# Altium PCB BikeLogger.PcbDoc (part 1 of 2)
Units mm, origin at the board's own origin, x right, y up, seen from the top; angles counter-clockwise.
Board outline 85 x 49 mm, 4 copper layers (Components_TopLayer, Ground Plane, Power Plane, Traces_BottomLayer), stack 1.567 mm thick; 105 components, 67 nets, 358 pads, 135 vias.
Unrouted connection lines stored in the file: 1.
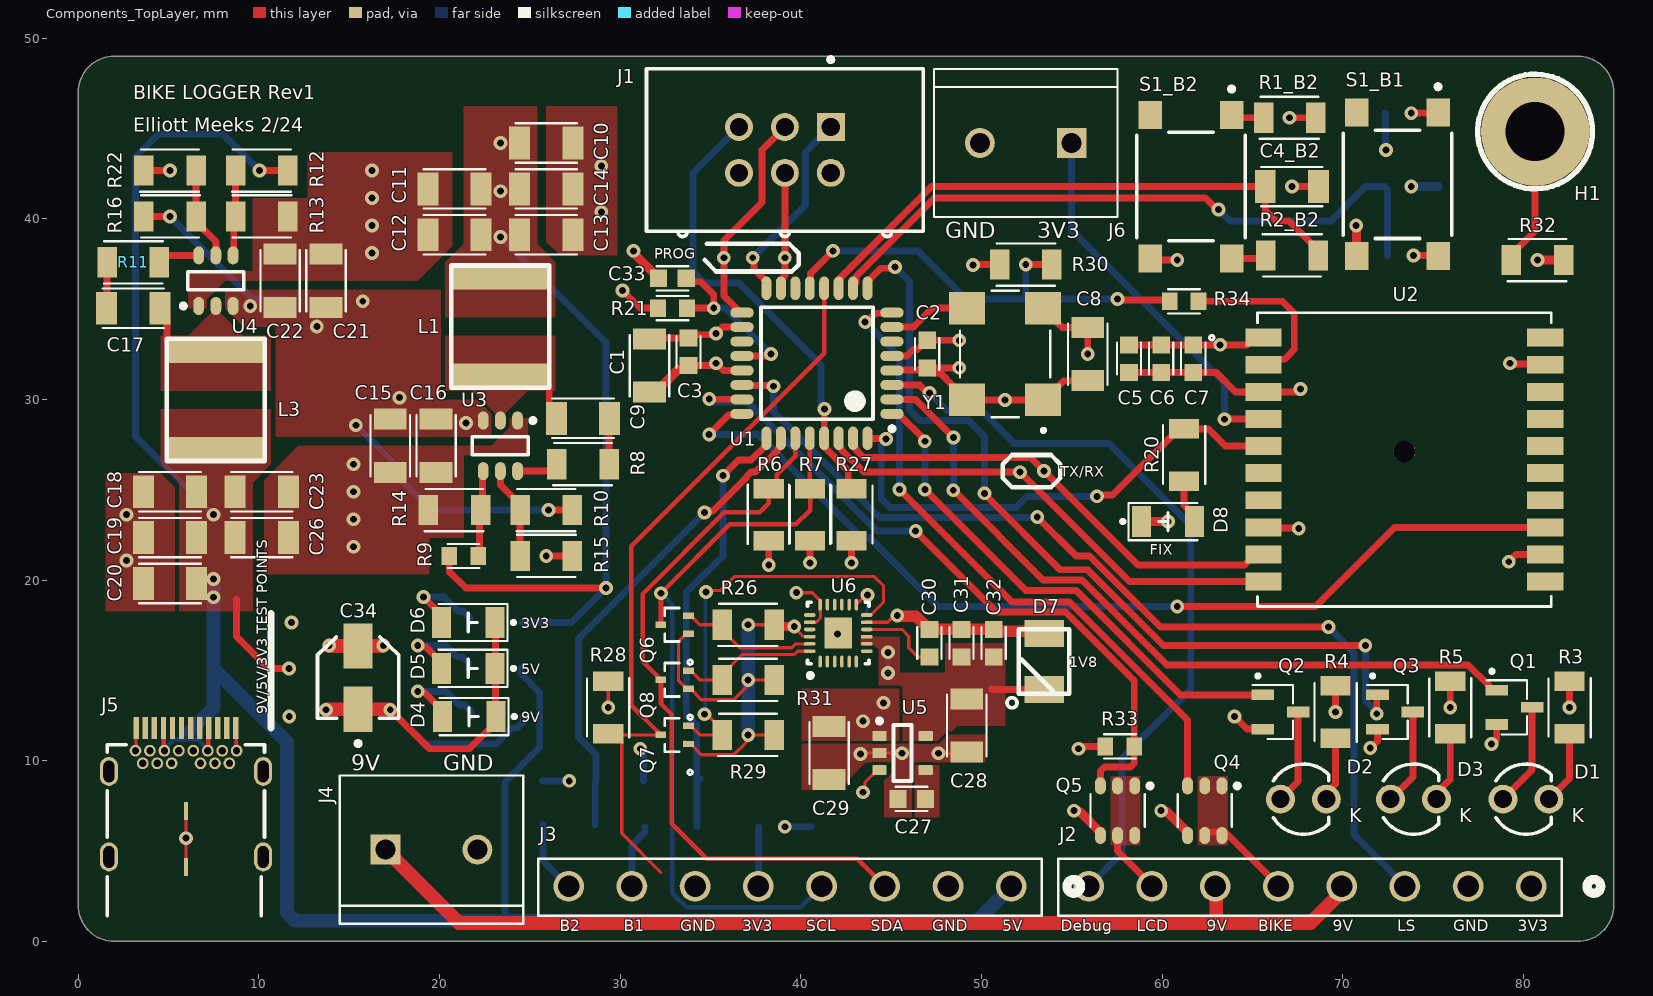
[diagram p0: Components_TopLayer view]
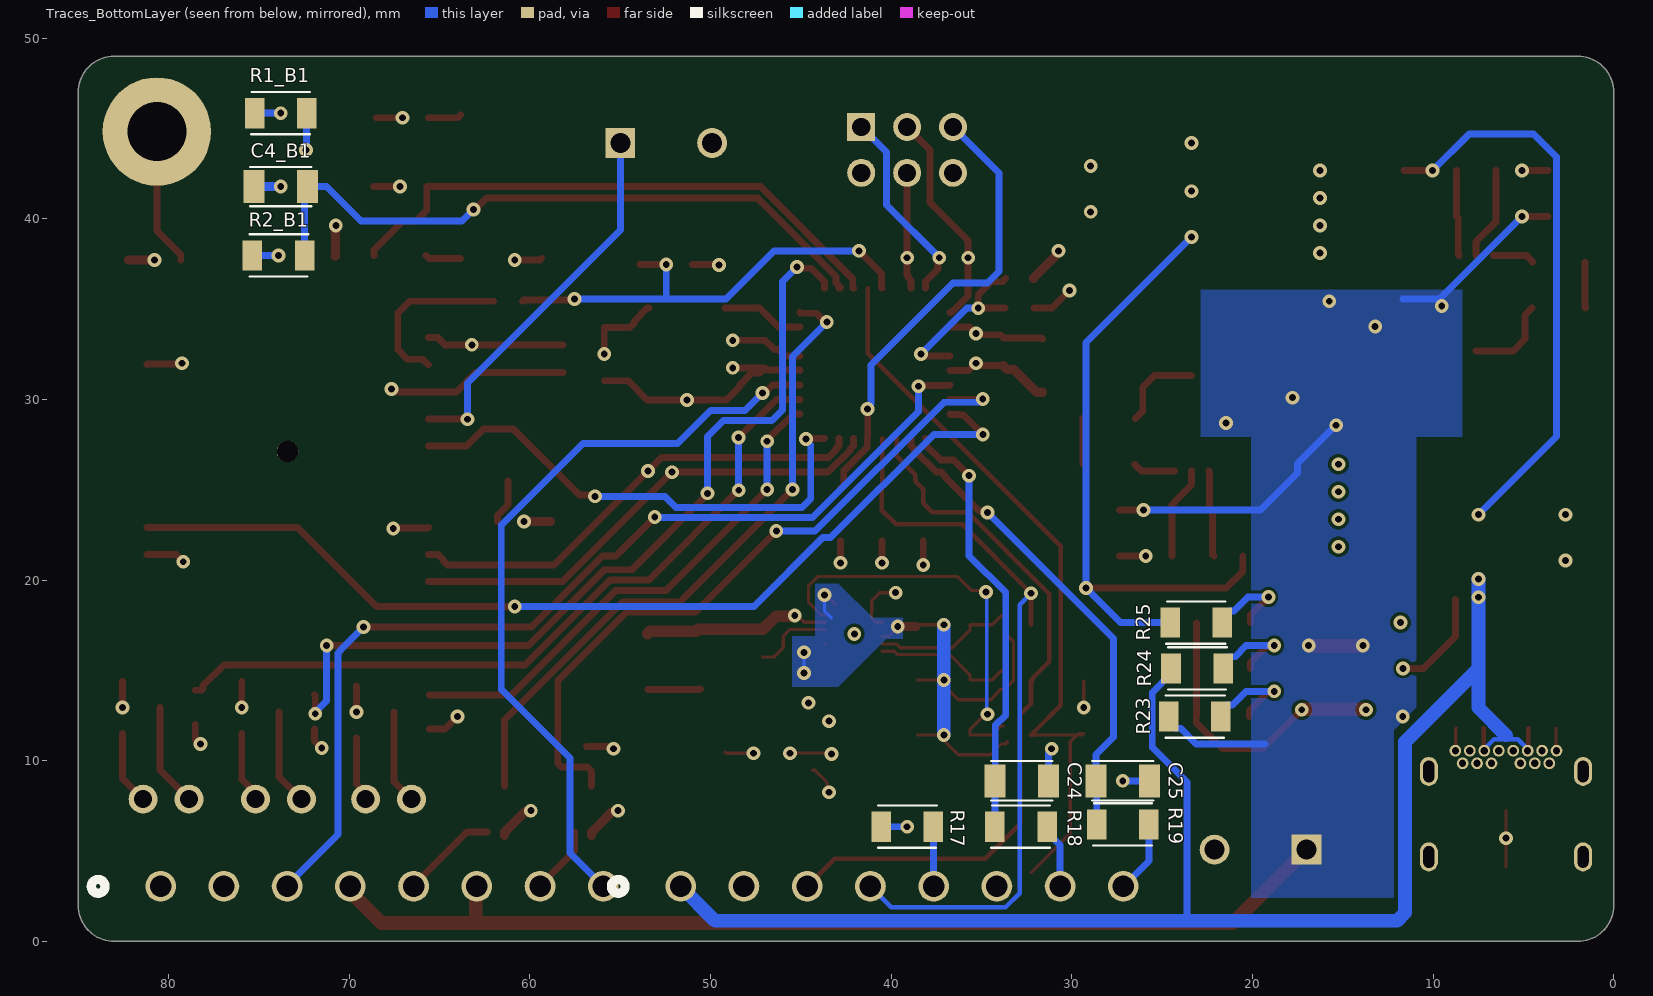
[diagram p1: Traces_BottomLayer view, seen from below]
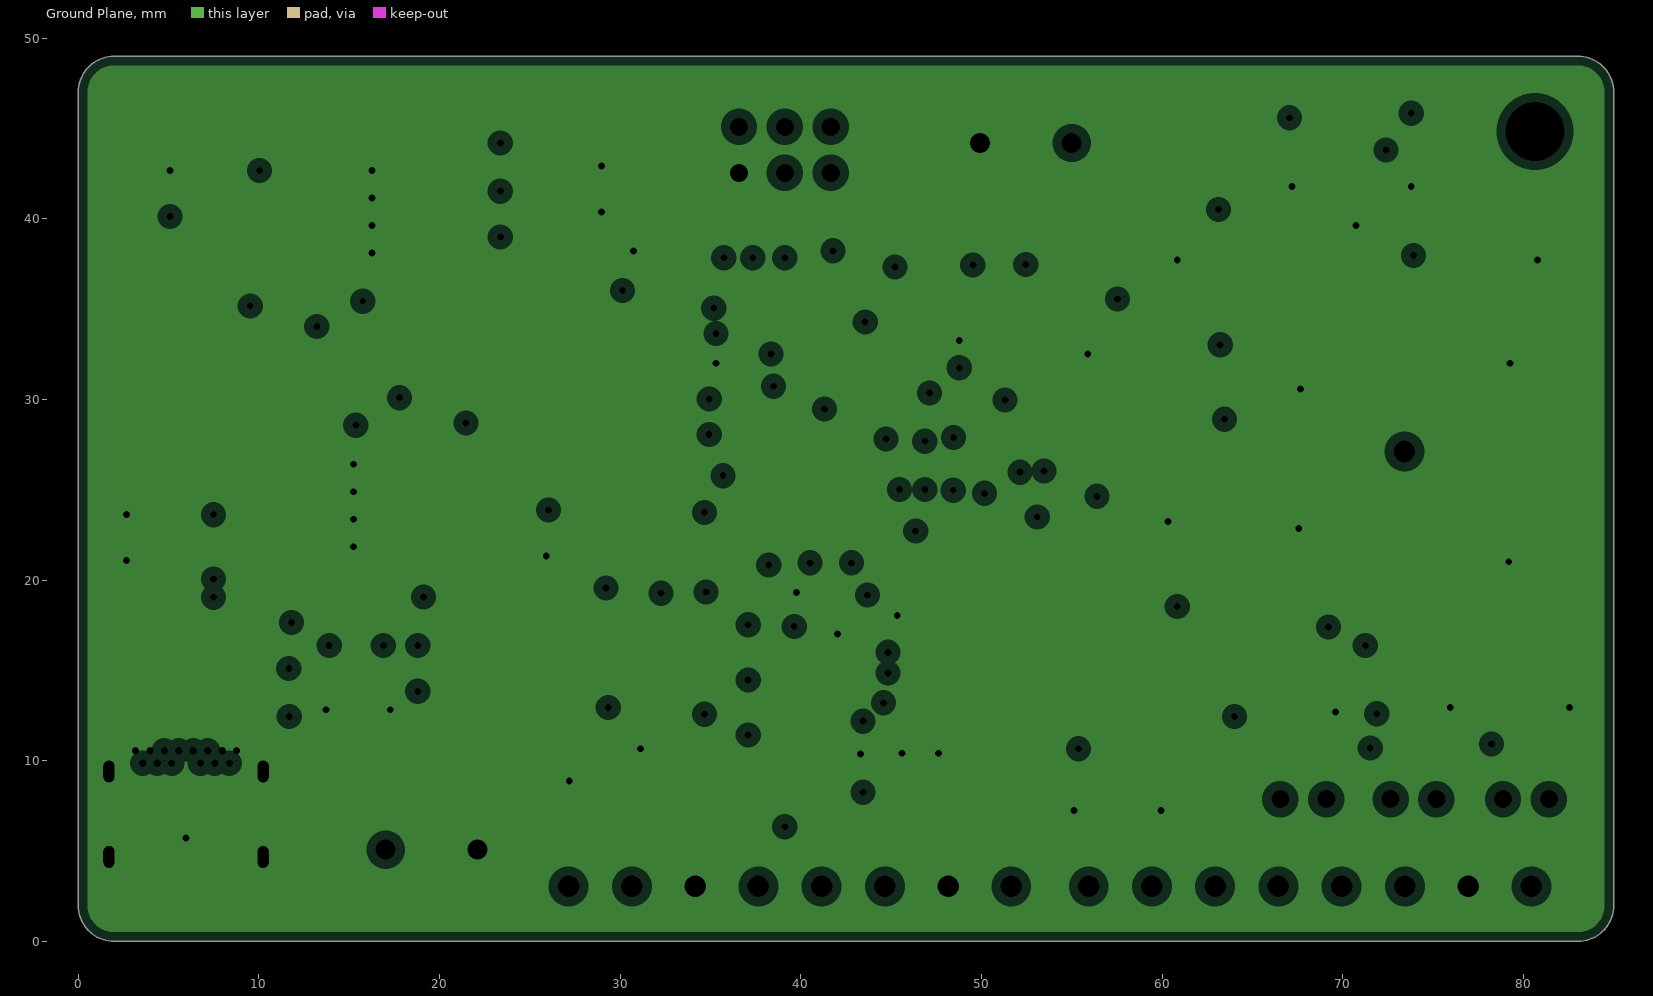
[diagram p2: Ground Plane, clearances drawn from the general rule]
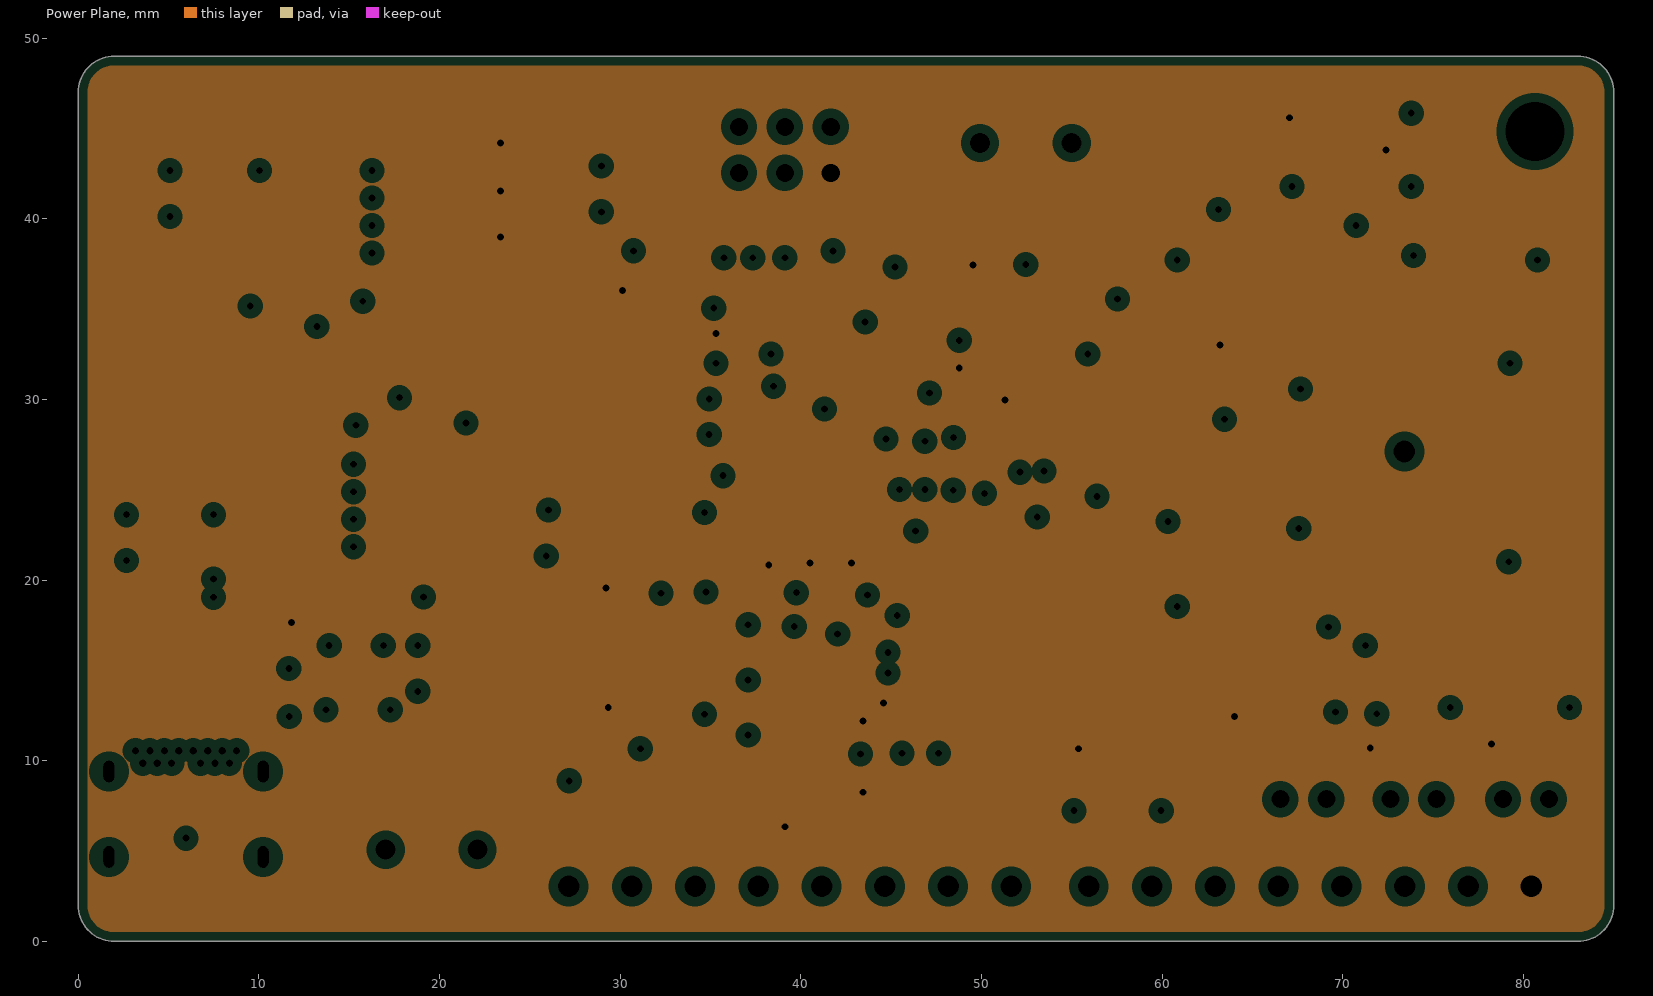
[diagram p3: Power Plane, clearances drawn from the general rule]
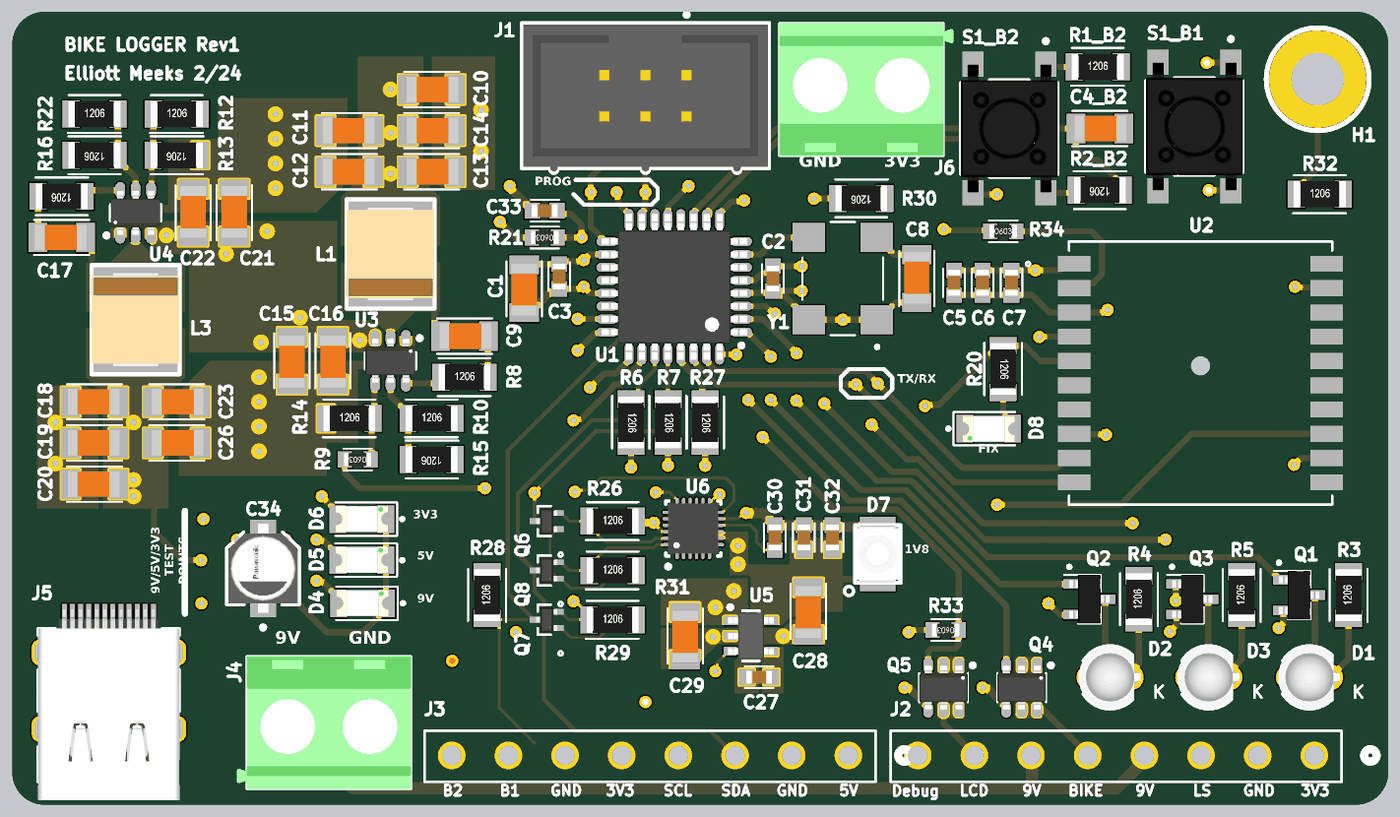
[diagram p5: 3D render of the assembled board from above, using the file's embedded part models]
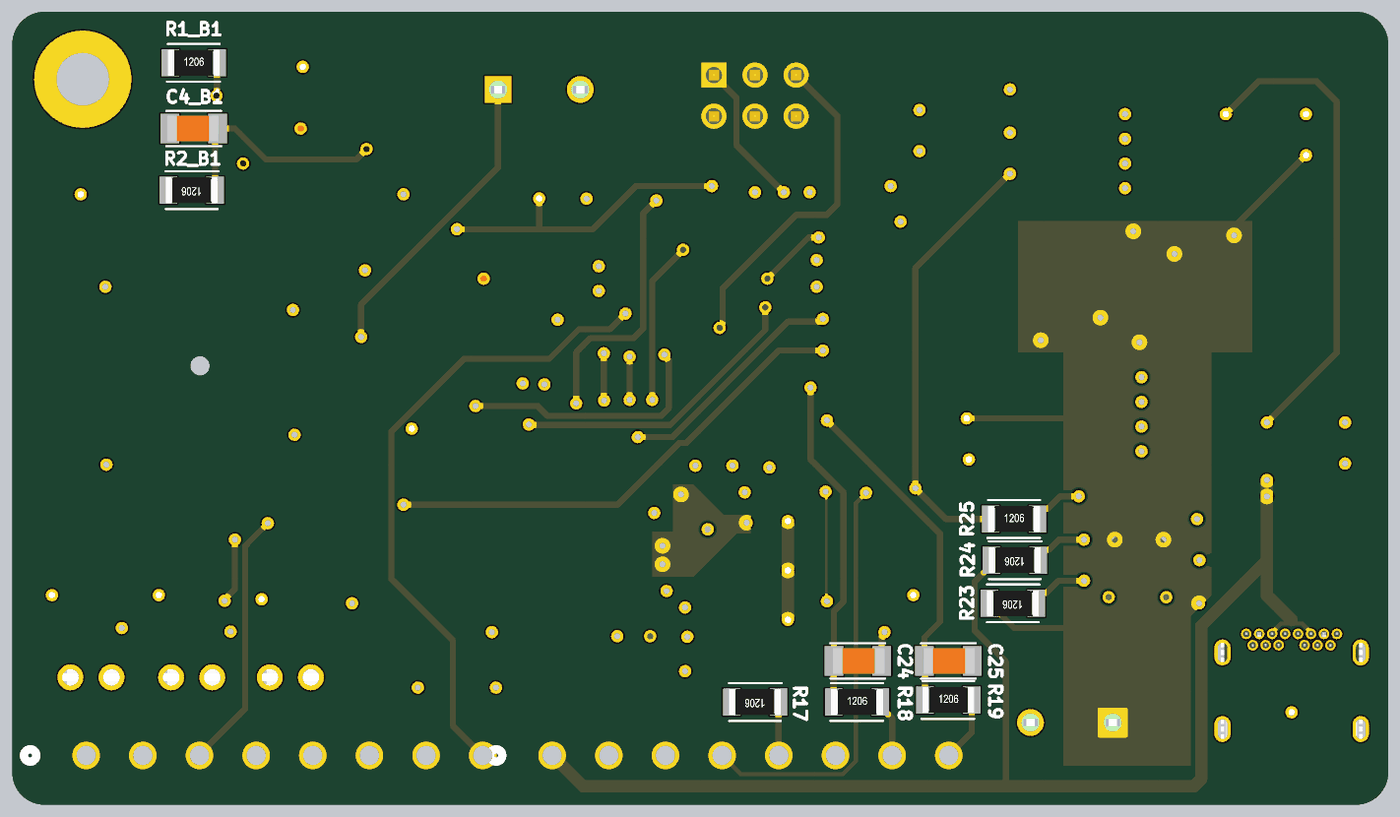
[diagram p6: 3D render of the assembled board from below, using the file's embedded part models]

## Layer stack, top to bottom
Top Solder: solder mask 0.0102, Solder Resist, Dk 3.5
Components_TopLayer: signal copper 0.035
Dielectric 3: prepreg 0.2184, PP-023, Dk 4.18
Ground Plane: plane copper 0.035, net GND
Dielectric 1: core 0.9906, Core-042, Dk 3.93
Power Plane: plane copper 0.035, net +3V3
Dielectric 2: prepreg 0.2184, PP-023, Dk 4.18
Traces_BottomLayer: signal copper 0.035
Bottom Solder: solder mask 0.0102, Solder Resist, Dk 3.5

## Board outline
0,2 0,47 cw(c2,47) 2,49 83,49 cw(c83,47) 85,47 85,2 cw(c83,2) 83,0 2,0 cw(c2,2)

## Design rules (kind name [scope] priority, off if disabled: settings)
BoardOutlineClearance [Not (OnLayer('Top Overlay') Or OnLayer('Bottom Overlay'))] p1: gap=0.508 ignorepadtopadclearanceinfootprint=FALSE except(0: Arc-SplitContinuation Track-SplitContinuation SMDPad-SplitContinuation THPad-SplitContinuation Via-SplitContinuation Fill-SplitContinuation Poly-SplitContinuation Region-SplitContinuation Text-OutlineEdge Text-CavityEdge Text-CutoutEdge Text-SplitBarrior Text-SplitContinuation)
Clearance CPWClearance [InNetClass('ImpedanceControlledCPW') vs InPolygon] p1: gap=0.254 ignorepadtopadclearanceinfootprint=FALSE
Clearance [All] p2: gap=0.178 ignorepadtopadclearanceinfootprint=FALSE except(0.254: Arc-Hole Track-Hole SMDPad-Hole THPad-Hole Via-Hole Fill-Hole Poly-Hole Region-Hole Text-Hole)
DiffPairsRouting [All] p1: maxlimit=0.254 minlimit=0.254 mostfreqgap=0.254 toplayer_minwidth=0.381 toplayer_maxwidth=25.4 toplayer_prefwidth=0.381 bottomlayer_minwidth=0.381 bottomlayer_maxwidth=25.4 bottomlayer_prefwidth=0.381 maxuncoupledlength=12.7
Height [All] p1: minheight=0 maxheight=35.56 prefheight=12.7
HoleSize [All] p1: absolutevalues=TRUE maxlimit=6.2 minlimit=0.3 maxpercent=80.000 minpercent=20.000
MinimumAnnularRing [All] p1: minimumring=0.152
MinimumSolderMaskSliver [All] p1 off: minsoldermaskwidth=0.229
PlaneClearance [All] p1: clearance=0.508
PlaneConnect [All] p1: planeconnectstyle=Direct reliefexpansion=0.508 reliefentries=4 reliefconductorwidth=0.254 reliefairgap=0.254
PolygonConnect [All] p1: connectstyle=Direct reliefconductorwidth=0.254 reliefentries=4 polygonreliefangle="90 Angle" airgapwidth=0.254
RoutingVias [All] p1: holewidth=0.381 width=0.762 viastyle="Through Hole" minholewidth=0.203 minwidth=0.508 maxholewidth=0.381 maxwidth=0.762
SilkToSilkClearance [All] p1 off: silktosilkclearance=0.254
SilkToSolderMaskClearance [IsPad] p1 off: minsilkscreentomaskgap=0.254 clearancetoexposedcopper=TRUE
SolderMaskExpansion [All] p1: expansion=0.102 istentingtop=FALSE
Width ImpedanceControlled [InNetClass('ImpedanceControlled')] p1: maxlimit=0.184 minlimit=0.184 preferedwidth=0.184 impedanceprofiledriven=TRUE minimp=50.000000 maximp=50.000000 favimp=50.000000
Width ImpedanceControlledCPW [InNetClass('ImpedanceControlledCPW')] p2: maxlimit=0.179 minlimit=0.179 preferedwidth=0.179 impedanceprofiledriven=TRUE minimp=50.000000 maximp=50.000000 favimp=50.000000
Width [All] p3: maxlimit=25.4 minlimit=0.178 preferedwidth=0.254
22 further rules are at their usual default settings.

## Classes and differential pairs
net class OUT[1..2]: OUT1 OUT2
channel class DebouncedButtons: B1 B2 B3
component class U_LEDs: D1 D2 D3 D4 D5 D6 Q1 Q2 Q3 R3 R4 R5 R23 R24 R25
component class U_IMU: C27 C28 C29 C30 C31 C32 D7 Q6 Q7 Q8 R26 R28 R29 R31 U5 U6
component class U_GPS: C5 C6 C7 D8 J6 R20 R34 U2
component class U_CPU: C1 C2 C3 C8 C33 J1 R6 R7 R21 R27 R30 U1 Y1
component class U_Connectors: C24 C25 C34 H1 J2 J3 J4 J5 Q4 Q5 R17 R18 R19 R32 R33
component class U_5VRegulator: C17 C18 C19 C20 C21 C22 C23 C26 L3 R11 R12 R13 R16 R22 U4
component class U_3v3Regulator: C9 C10 C11 C12 C13 C14 C15 C16 L1 R8 R9 R10 R14 R15 U3
component class B2: C4_B2 R1_B2 R2_B2 S1_B2
component class B1: C4_B1 R1_B1 R2_B1 S1_B1

## Components (designator, comment, footprint, x,y, rotation, side; value= is the part's Value field where it differs from the comment)
C1 "4.7uF" C1206 31.623,31.877 r90 top
C2 "0.1UF" C0603 46.99,32.512 r270 top
C3 "0.1UF" C0603 33.782,32.639 r90 top
C4_B1 "1uF" C1206 73.787,41.783 r180 bottom (schematic designator C4)
C4_B2 "1uF" C1206 67.183,41.783 r180 top (schematic designator C4)
C5 "0.1UF" C0603 58.166,32.258 r90 top
C6 "0.1UF" C0603 59.944,32.258 r90 top
C7 "0.1UF" C0603 61.722,32.258 r90 top
C8 "10nF" C1206 55.88,32.512 r270 top
C9 "0.1UF" C1206 27.94,28.956 r180 top
C10 "10UF" C1206 25.908,44.196 r180 top
C11 "10UF" C1206 20.828,41.656 r0 top
C12 "10UF" C1206 20.828,39.116 r0 top
C13 "10UF" C1206 25.908,39.116 r180 top
C14 "10UF" C1206 25.908,41.656 r180 top
C15 "10UF" C1206 17.272,27.432 r90 top
C16 "0.1UF" C1206 19.812,27.432 r90 top
C17 "0.1UF" C1206 3.048,35.052 r0 top
C18 "10UF" C1206 5.08,24.892 r0 top
C19 "10UF" C1206 5.08,22.352 r0 top
C20 "10UF" C1206 5.08,19.812 r0 top
C21 "10UF" C1206 13.716,36.576 r270 top
C22 "0.1UF" C1206 11.176,36.576 r270 top
C23 "10UF" C1206 10.16,24.892 r180 top
C24 "1uF" C1206 32.766,8.89 r0 bottom
C25 "1uF" C1206 27.178,8.89 r0 bottom
C26 "10UF" C1206 10.16,22.352 r180 top
C27 "0.1uF" GMC10X7R104J10NT-Footprint-1 46.137,7.889 r0 top
C28 "2.2uF" C1206 49.185,11.953 r90 top
C29 "1uF" C1206 41.565,10.429 r90 top
C30 "0.1uF" GMC10X7R104J10NT-Footprint-1 47.117,16.51 r270 top
C31 "0.1 uF" GMC10X7R104J10NT-Footprint-1 48.895,16.51 r270 top
C32 "0.1uF" GMC10X7R104J10NT-Footprint-1 50.673,16.51 r270 top
C33 "0.1UF" C0603 32.893,36.703 r0 top
C34 "EEEFK1E100R" FP-FKB-MFG 15.494,14.605 r90 top
D1 "350-1556-ND" 350-1556-ND-Footprint-1 80.264,7.874 r0 top
D2 "151033BS03000" "Type 3mm" 67.818,7.874 r0 top
D3 "151031VS04000" "Type 3mm" 73.914,7.874 r0 top
D4 "HSMS-C150" LEDC1206 21.639,12.446 r180 top
D5 "HSMS-C150" LEDC1206 21.59,15.113 r180 top
D6 "HSMS-C150" LEDC1206 21.59,17.653 r180 top
D7 "AA3528LSECKT/J3" "New footprint 1" 53.467,15.494 r270 top
D8 "HSMS-C150" LEDC1206 60.325,23.241 r0 top
H1 "ConductiveMountingHole128Mil" 128MIL_MOUNTING_HOLE 80.645,44.831 r0 top
J1 "SBH11-NBPC-D03-ST-BK" FP-SBH11-NBPC-D03-ST-BK-MFG 39.116,43.815 r180 top
J2 "1945151" 1945151-Footprint-1 68.244,3.048 r180 top
J3 "1945151" 1945151-Footprint-1 39.456,3.048 r180 top
J4 "282837-2" TE_282837-2 19.558,5.08 r0 top
J5 "632723100011" 632723100011 5.969,5.879 r0 top
J6 "282837-2" TE_282837-2 52.451,44.196 r180 top
L1 "IHLP2020CZER4R7M11" IHLP2020CZER4R7M11 23.368,34.036 r90 top
L3 "4.7uH" IHLP2020CZER4R7M11 7.62,29.972 r270 top
Q1 "BSS84" SOT23 79.502,12.954 r270 top
Q2 "BSS84" SOT23 66.548,12.7 r270 top
Q3 "BSS84" SOT23 72.898,12.7 r270 top
Q4 "RVQ040N05" TSMT6 62.357,7.239 r270 top
Q5 "RVQ040N05" TSMT6 57.531,7.239 r270 top
Q6 "RE1C002UNTCL" DIO_RB558WMF_ROM 33.02,17.526 r90 top
Q7 "RE1C002UNTCL" DIO_RB558WMF_ROM 33.02,11.43 r90 top
Q8 "RE1C002UNTCL" DIO_RB558WMF_ROM 33.02,14.478 r90 top
R1_B1 "10k" R1206 73.787,45.847 r180 bottom (schematic designator R1)
R1_B2 "10k" R1206 67.056,45.593 r0 top (schematic designator R1)
R2_B1 "10k" R1206 73.914,37.973 r0 bottom (schematic designator R2)
R2_B2 "10k" R1206 67.183,37.973 r180 top (schematic designator R2)
R3 "120" R1206 82.55,12.954 r90 top
R4 "22" R1206 69.596,12.7 r90 top
R5 "51" R1206 75.946,12.954 r90 top
R6 "10k" R1206 38.227,23.622 r270 top
R7 "10k" R1206 40.513,23.622 r270 top
R8 "ERA-8AHD300V" R1206 27.94,26.416 r0 top
R9 "CRCW060330K9FKEA" R0603 21.336,21.336 r180 top
R10 "CRCW1206174KFKEA" PCBComponent_1 25.908,23.876 r0 top
R11 "30" R1206 3.048,37.592 r180 top
R12 "52.3k" R1206 10.16,42.672 r0 top
R13 "10k" R1206 10.16,40.132 r180 top
R14 "10k" R1206 20.828,23.876 r0 top
R15 "CRCW120636K5FKEA" PCBComponent_1 25.908,21.336 r180 top
R16 "174k" PCBComponent_1 5.08,40.132 r180 top
R17 "ERA-8AEB103V" R1206 39.116,6.35 r0 bottom
R18 "10k" R1206 32.814,6.35 r180 bottom
R19 "10k" R1206 27.178,6.477 r180 bottom
R20 "51" R1206 61.214,26.924 r270 top
R21 "DNP" R0603 32.893,35.052 r180 top
R22 "36.5k" PCBComponent_1 5.08,42.672 r0 top
R23 "330" R1206 23.193,12.446 r0 bottom
R24 "120" R1206 23.065,15.113 r0 bottom
R25 "51" R1206 23.114,17.653 r180 bottom
R26 "10k" R1206 37.084,17.526 r0 top
R27 "10k" R1206 42.799,23.622 r270 top
R28 "10k" R1206 29.337,12.954 r90 top
R29 "10k" R1206 37.084,11.43 r0 top
R30 "10k" R1206 52.451,37.465 r180 top
R31 "10k" R1206 37.084,14.478 r0 top
R32 "100k" R1206 80.772,37.719 r0 top
R33 "DNP" R0603 57.658,10.795 r180 top
R34 "DNP" R0603 61.214,35.433 r0 top
S1_B1 "PTS645SM43SMTR92LFS" FP-PTS645SM43SMTR92LFS-MFG 73.025,41.91 r270 top (schematic designator S1)
S1_B2 "PTS645SM43SMTR92LFS" FP-PTS645SM43SMTR92LFS-MFG 61.595,41.783 r270 top (schematic designator S1)
U1 "ATMEGA328PB-AU" ATML-32A_L 40.894,32.004 r180 top
U2 "PA1616S" PA1616S-Footprint-1 73.406,26.67 r0 top
U3 "AP63301WU-7" TSOT-23-6 23.368,27.432 r270 top
U4 "AP63301WU-7" TSOT-23-6 7.62,36.576 r90 top
U5 "LP2985A-18DBVJ" DBV0005A_L 45.629,10.429 r0 top
U6 "ICM-20948" TDK-QFN-24_L 42.072,17.069 r90 top
Y1 "CB3LV-3C-7M372800" OSC_CB3LV-3C-7M372800 51.308,32.512 r90 top

## Footprints (in the part's own frame and the unit in brackets; to place one, negate y for a bottom-side part, rotate by r counter-clockwise, add the part's x,y. Pads: shape width x height; smd on the part's side, far side on the other; paste and mask are expansions set on the pad)
128MIL_MOUNTING_HOLE [mm] "0.128\" Mounting Hole"
  round 6 hole 3.251: 1(0,0)
  silkscreen extent -3.17,-3.17 3.17,3.17
350-1556-ND-Footprint-1 [mm]
  round 1.6 hole 1: 1(1.143,0) 2(-1.397,0)
  silkscreen extent -1.79,-1.95 1.27,1.95, body extent -2.06,-1.94 1.74,1.94, height 10.5
1945151-Footprint-1 [mil]
  round 67 / inner round 60 / far side round 67 hole 47 paste-33.5 mask+0: 1(-480,0) 2(-342.2,0) 3(-204.41,0) 4(-66.61,0) 5(71.18,0) 6(208.98,0) 7(346.77,0) 8(484.57,0)
  silkscreen extent -631,-60 551,64
632723100011 [mm] "USB 3.1 Type C Receptacle Horizontal THR"
  rect 0.3x1.2 smd: A1(-2.75,5.93) A2(-2.25,5.93) A3(-1.75,5.93) A4(-1.25,5.93) A5(-0.75,5.93) A6(-0.25,5.93) A7(0.25,5.93) A8(0.75,5.93) A9(1.25,5.93) A10(1.75,5.93) A11(2.25,5.93) A12(2.75,5.93)
  round 0.65 hole 0.4: B1(2.8,4.68) B2(2.4,3.98) B3(1.6,3.98) B4(1.2,4.68) B5(0.8,3.98) B6(0.4,4.68) B7(-0.4,4.68) B8(-0.8,3.98) B9(-1.2,4.68) B10(-1.6,3.98) B11(-2.4,3.98) B12(-2.8,4.68) Shell(-2,4.68) Shell(2,4.68)
  oval 1x1.6 hole 0.6 slot 1.2 at 90 deg: Shell(-4.27,-1.2) Shell(-4.27,3.53) Shell(4.27,-1.2) Shell(4.27,3.53)
  rect 0.2x1 smd: Shell(0,-1.75) Shell(0,1.35)
  silkscreen extent -4.37,-4.45 4.34,5, body extent -4.37,-5.6 4.37,6.19, height 3.05
ATML-32A_L [mm] "TQFP, 32-Leads, Body 7x7mm, Pitch 0.8mm, IPC High Density"
  oval 1.3x0.55 smd: 1(-4.15,2.8) 2(-4.15,2) 3(-4.15,1.2) 4(-4.15,0.4) 5(-4.15,-0.4) 6(-4.15,-1.2) 7(-4.15,-2) 8(-4.15,-2.8) 17(4.15,-2.8) 18(4.15,-2) 19(4.15,-1.2) 20(4.15,-0.4) 21(4.15,0.4) 22(4.15,1.2) 23(4.15,2) 24(4.15,2.8)
  oval 0.55x1.3 smd: 9(-2.8,-4.15) 10(-2,-4.15) 11(-1.2,-4.15) 12(-0.4,-4.15) 13(0.4,-4.15) 14(1.2,-4.15) 15(2,-4.15) 16(2.8,-4.15) 25(2.8,4.15) 26(2,4.15) 27(1.2,4.15) 28(0.4,4.15) 29(-0.4,4.15) 30(-1.2,4.15) 31(-2,4.15) 32(-2.8,4.15)
  silkscreen extent -4.28,-3.1 3.1,3.75, body extent -4.5,-4.5 4.5,4.5, height 1.2
C0603 [mm] "Capacitor, Chip;1.65 mm L X 0.85 mm W X 0.95 mm H body"
  rect 0.95x0.98 smd: 1(-0.765,0) 2(0.765,0)
  silkscreen extent -0.88,-0.67 0.88,0.67, body extent -0.8,-0.4 0.8,0.4, height 0.9
C1206 [mm] "3.20 mm L X 1.60 mm W X 1.40 mm H body"
  rect 1.16x1.82 smd: 1(-1.475,0) 2(1.475,0)
  silkscreen extent -1.7,-1.09 1.7,1.09, body extent -1.65,-0.8 1.55,0.8, height 1.15
DBV0005A_L [mm] "SOT23, 5-Leads, Body 3.05x1.75mm, Pitch 0.95mm, IPC High Density"
  rrect18% 0.8x0.55 smd: 1(-1.275,0.95) 2(-1.275,0) 3(-1.275,-0.95) 4(1.275,-0.95) 5(1.275,0.95)
  silkscreen extent -1.4,-1.55 0.5,1.9, body extent -1.42,-1.46 1.42,1.46, height 1.08
DIO_RB558WMF_ROM [mil]
  rect 14x23 smd paste+0 mask+0: D(0,30) G(-19.68,-30) S(19.68,-30)
  silkscreen extent -86,-39 36,22, body extent -31,-26 31,26, height 34
FP-FKB-MFG [mm]
  rect 2.5x1.6 smd paste+0 mask+0: 1(-1.75,0) 2(1.75,0)
  silkscreen extent -3.77,-2.25 2.25,2.25, body extent -3.25,-2.5 3.25,2.5, height 0.25
FP-PTS645SM43SMTR92LFS-MFG [mm]
  rect 1.55x1.3 smd paste+0 mask+0: 1(-3.975,2.25) 2(3.975,2.25) 3(-3.975,-2.25) 4(3.975,-2.25)
  silkscreen extent -5.52,-3 3,3, body extent -4.85,-3.1 4.85,3.1, height 0.25
FP-SBH11-NBPC-D03-ST-BK-MFG [mm]
  rect 1.55x1.55 hole 1 paste-1000 mask+0: 1(-2.54,-1.27)
  round 1.55 hole 1 paste-1000 mask+0: 2(-2.54,1.27) 3(0,-1.27) 4(0,1.27) 5(2.54,-1.27) 6(2.54,1.27)
  silkscreen extent -7.66,-5.12 7.66,4.8, body extent -7.76,-4.6 7.76,4.9, height 0.25
GMC10X7R104J10NT-Footprint-1 [mm]
  rect 0.95x0.98 smd: 1(-0.765,0) 2(0.765,0)
  silkscreen extent -0.88,-0.67 0.88,0.67, body extent -0.8,-0.4 0.8,0.4, height 0.9
IHLP2020CZER4R7M11 [mm] "FIXED IND 4.7UH 4.5A 60 MOHM SMD"
  rect 1.32x5.434 smd: 1(-2.718,0) 2(2.718,0)
  silkscreen extent -3.38,-2.72 3.38,2.72, body extent -2.87,-2.72 2.87,2.72, height 3.05
LEDC1206 [mm] "LED, Chip;3.20 mm L X 1.60 mm W X 1.10 mm H body"
  rect 1.05x1.7 smd: A(1.475,0) C(-1.475,0)
  silkscreen extent -2.6,-1.03 1.63,1.03, body extent -1.6,-0.81 1.6,0.79, height 1.1
"New footprint 1" [mm]
  rect 1.5x2.2 smd: 1(-1.55,0) 2(1.55,0)
  silkscreen extent -1.78,-2.06 2.57,1.4, body extent -1.75,-1.4 1.75,1.4, height 1.9
OSC_CB3LV-3C-7M372800 [mm]
  rect 1.8x2 smd: 1(-2.54,-2.1) 2(2.54,-2.1) 3(2.54,2.1) 4(-2.54,2.1)
  silkscreen extent -4.32,-2.5 3.5,2.5
PA1616S-Footprint-1 [mil]
  rect 79x39 smd paste+0 mask+0: 1(-307.09,265.75) 2(-307.09,206.69) 3(-307.09,147.64) 4(-307.09,88.58) 5(-307.09,29.53) 6(-307.09,-29.53) 7(-307.09,-88.58) 8(-307.09,-147.64) 9(-307.09,-206.69) 10(-307.09,-265.75) 11(307.09,-265.75) 12(307.09,-206.69) 13(307.09,-147.64) 14(307.09,-88.58) 15(307.09,-29.53) 16(307.09,29.53) 17(307.09,88.58) 18(307.09,147.64) 19(307.09,206.69) 20(307.09,265.75)
  round 47 / inner round 60 / far side round 47 hole 47 unplated paste-23.5 mask-23.5: 21(0,17.72)
  silkscreen extent -425,-320 320,320
PCBComponent_1 [mm]
  rect 1.08x1.67 smd: 1(-1.445,0) 2(1.445,0)
  silkscreen extent -1.65,-1.17 1.61,1.17, body extent -1.6,-0.8 1.6,0.8, height 0.6
R0603 [mm] "Resistor, Chip; 0603, .022\" Height"
  rect 0.87x0.98 smd: 1(-0.8,0) 2(0.8,0)
  silkscreen extent -0.88,-0.67 0.88,0.67, body extent -0.85,-0.4 0.85,0.4, height 0.56
R1206 [mm] "Resistor, Chip; 1206; 24 mil Height"
  rect 1.08x1.67 smd: 1(-1.445,0) 2(1.445,0)
  silkscreen extent -1.65,-1.17 1.61,1.17, body extent -1.6,-0.8 1.6,0.8, height 0.6
SOT23 [mm] "Small Outline Transistor (SOT23), 0.95 mm pitch;3 pin,2.90 mm L X 1.30 mm W X 1.10 mm H body"
  rect 0.59x1.26 smd: 1(-0.95,-0.98) 2(0.95,-0.98) 3(0,0.98)
  silkscreen extent -2.1,-1.55 1.5,0.7, body extent -1.5,-1.25 1.5,1.25, height 1.06
TDK-QFN-24_L [mm] "QFN, 24-Leads, Body 3.10x3.10mm, Pitch 0.40mm, Thermal Pad 1.70x1.54mm, IPC High Density"
  oval 0.65x0.2 smd: 1(-1.575,1) 2(-1.575,0.6) 3(-1.575,0.2) 4(-1.575,-0.2) 5(-1.575,-0.6) 6(-1.575,-1) 13(1.575,-1) 14(1.575,-0.6) 15(1.575,-0.2) 16(1.575,0.2) 17(1.575,0.6) 18(1.575,1)
  oval 0.2x0.65 smd: 7(-1,-1.575) 8(-0.6,-1.575) 9(-0.2,-1.575) 10(0.2,-1.575) 11(0.6,-1.575) 12(1,-1.575) 19(1,1.575) 20(0.6,1.575) 21(0.2,1.575) 22(-0.2,1.575) 23(-0.6,1.575) 24(-1,1.575)
  rect 1.7x1.54 smd: 25(0,0)
  silkscreen extent -2.47,-1.7 1.7,1.7, body extent -1.55,-1.55 1.55,1.55, height 1.05
TE_282837-2 [mm]
  rect 1.65x1.65 / inner round 1.65 / far side rect 1.65x1.65 hole 1.1: 1(-2.54,0)
  round 1.65 hole 1.1: 2(2.54,0)
  silkscreen extent -5.08,-4.1 5.08,4.1, body extent -5.68,-4.1 5.08,4.1, height 10
TSMT6 [mm] "Rohm Semiconductor TSMT6"
  oval 0.95x0.6 smd: 1(-1.375,0.95) 2(-1.375,0) 3(-1.375,-0.95) 4(1.375,-0.95) 5(1.375,0) 6(1.375,0.95)
  silkscreen extent -1.5,-1.5 0.9,1.93, body extent -1.39,-1.5 1.39,1.5, height 1
TSOT-23-6 [mm] "TSOP, 6-Leads, Body 2.90x1.60mm, Pitch 0.95mm, IPC Medium Density"
  oval 1x0.6 smd: 1(-1.4,0.95) 2(-1.4,0) 3(-1.4,-0.95) 4(1.4,-0.95) 5(1.4,0) 6(1.4,0.95)
  silkscreen extent -1.52,-1.55 0.5,1.93, body extent -1.39,-1.55 1.39,1.55, height 1.1
"Type 3mm" [mm] "THT, LED-3mm, 2pin- Body 4.15mm(max)"
  round 1.6 hole 1: 1(1.27,0) 2(-1.27,0)
  silkscreen extent -1.66,-1.95 1.4,1.95, body extent -1.93,-1.94 1.87,1.94, height 10.5

## Part data
C1: library part CMP-054-000019-2, "CER 4.7uF 50V X7R 1206", Design Item ID=CL31B475KBHNNNE, Made By="Brennan Swanton", Reviewed By="Carter Allen", Source=Capacitors.SchLib
C2 C3 C5 C6 C7 C33: library part CMP-054-000044-3, "CAP CER 0.1UF 50V X7R 0603", Design Item ID=ESD35C104K4T2A-24, Made By="Brennan Swanton", Source=Capacitors.SchLib, Supplier SKU=478-8009-1-ND
C4_B1 C4_B2 C24 C25 C29: library part CMP-054-000013-4, "CER 1UF 50V X7R 1206", Supplier Part Number 1=399-C1206C105K5RAC7800CT-ND, Design Item ID=CL31B105KBHNNNE, Made By="Brennan Swanton", Reviewed By="Carter Allen", Source=Capacitors.SchLib, Supplier 1=Digi-Key
C8: library part CMP-054-000011-1, "CER 10nF 50V X7R 1206", Design Item ID=CL31B103KBCNNNC, Made By="Brennan Swanton", Reviewed By="Carter Allen", Source=Capacitors.SchLib
C9 C16 C17 C22: library part CMP-054-000012-4, "CAP CER 0.1UF 50V C0G/NP0 1206", Design Item ID=CL31B104KBCNNNC, Made By="Brennan Swanton", Reviewed By="Carter Allen", Source=Capacitors.SchLib
C10 C11 C12 C13 C14 C15 C18 C19 C20 C21 C23 C26: library part CMP-054-000014-3, "CER 10UF 35V X7R 1206", Design Item ID=CL31B106KLHNNNE, Made By="Brennan Swanton", Reviewed By="Carter Allen", Source=Capacitors.SchLib, Supplier SKU=1276-3103-1-ND
C27 C30 C31 C32: library part 2571-GMC10X7R104J10NTTR-ND-14, "0.1 µF ±5% 10V Ceramic Capacitor X7R 0603 (1608 Metric)"
C28: library part CMP-054-000016-3, "CAP CER 2.2UF 50V X7R 1206", Design Item ID=CL31B225KBHNNNE, Source=Capacitors.SchLib
C34: library part CMP-05427-000055-1, "CAP ALUM 10UF 20% 25V SMD", Capacitance=10uF, Case/Package=Radial, Dielectric Material=Aluminium, ESR (Equivalent Series Resistance)=1.35R, Leakage Current=3uA, Max Operating Temperature=105°C, Min Operating Temperature=-55°C, Package Quantity=1, Ripple Current=90mA, Tolerance=20%, Voltage=25V, Construction=Cylindrical, Contact Plating=Tin, Diameter=4mm, Height=5.8mm, Height - Seated (Max)=0.24inch, Impedance=1.35R, Lead Free="Lead Free", Length=5.8mm, Life (Hours)=2000Hour, Mount="Surface Mount", Number of Pins=2, Packaging="Tape and Reel", Polarity=Polar, Radiation Hardening=No, REACH SVHC="No SVHC", Ripple Current (AC)=90mA, RoHS Compliant=Yes, Series=FK, Termination=SMD/SMT, Voltage Rating=25V, Voltage Rating (DC)=25V, Width=5.5mm
D1: library part CMP-00044-1, "LED ORANGE DIFFUSED 3MM T/H", Case/Package=Radial, Color=Orange, Current Rating=25mA, Forward Current=10mA, Forward Voltage=2.2V, Max Operating Temperature=100°C, Min Operating Temperature=-55°C, Power Dissipation=135mW, Depth=3.2mm, Diameter=2.92mm, Dominant Wavelength=602nm, Height=6mm, Lead Free="Lead Free", Length=3.2mm, Lens Color=Orange, Lens Size=3mm, Lens Style=Round,Domed,Diffused, Lens Transparency=Diffused, Luminous Intensity=7mcd, Made By="Elliott Meeks", Mount="Through Hole", Number of Elements=1, Number of LEDs=1, Number of Pins=2, Packaging=Bulk, Radiation Hardening=No, Reach SVHC Compliant=No, RoHS Compliant=Yes, Series=521, Supplier 1=DigiKey, Supplier Part Number 1=350-1556-ND, Test Current=10mA, Viewing Angle=60°, Wavelength=600nm
D2: library part CMP-00043-1, "Led, Blue, T-1 (3Mm), 470 Nm, 2.8 V, 30 Ma, 3.8 Cd Rohs Compliant: Yes", Case/Package=Radial, Color=Blue, Forward Current=30mA, Forward Voltage=2.8V, Lens Color=Colorless, Max Operating Temperature=85°C, Min Operating Temperature=-40°C, Test Current=20mA, Dominant Wavelength=470nm, Height=5.55mm, Lens Size=3mm, Lens Style=Round,Domed,Circular, Lens Transparency=Clear, Luminous Intensity=3800mcd, Mount="Through Hole", Reach SVHC Compliant=Unknown, RoHS Compliant=Yes, Series=WL-TMRW, Viewing Angle=30°, Wavelength=470nm
D3: library part CMP-00028-6, "Led, Green, T-1 (3Mm), 570 Nm, 2.1 V, 30 Ma, 120 Mcd Rohs Compliant: Yes", Case/Package=Radial, Color=Green, Forward Current=30mA, Forward Voltage=2.1V, Max Operating Temperature=85°C, Min Operating Temperature=-40°C, Package Quantity=1, Test Current=20mA, Dominant Wavelength=570nm, Height=5.55mm, Lens Color=Green, Lens Size=3mm, Lens Style=Round,Domed,Circular, Lens Transparency=Diffused, Luminous Intensity=120mcd, Made By="Adam Lewczuk", Mount="Through Hole", Packaging=Bulk, RoHS Compliant=Yes, Series=WL-TMRC, Viewing Angle=40°, Wavelength=570nm
D4 D5 D6 D8: library part CMP-043-000005-1, "LED RED DIFFUSED 1206 2.2V 20mA", Design Item ID=HSMS-C150, Made By="Brennan Swanton", Reviewed By="Jamie Smith", Source=Diodes.SchLib
D7: library part CMP-00002-6, "Red 625nm LED Indication - Discrete 1.8V 2-PLCC"
H1: library part CMP-00028-00000-1, "0.128\" Mounting Hole w/ Conductive Pad", Design Item ID=ConductiveMountingHole128Mil, Source=Misc.SchLib
J1: library part CMP-00595-33729071-1, "SBH11-NBPC-D03-ST-BK Conn Header Vert 6POS 2.54MM", Color=Black, Current Rating=3A, Max Operating Temperature=105°C, Min Operating Temperature=-40°C, Connector Type="Male Pin", Contact Material="Gold, Nickel", Contact Plating=Gold, Height=9.3mm, Mount="Through Hole", NexarPartId=33729071, Number of Contacts=6, Number of Positions=6, Number of Rows=2, Pitch=2.54mm, RoHS=Compliant, Row Spacing=2.54mm, Termination=Solder
J2 J3: library part CMP-00102-1, "Strip Terminal Block, 8A, 1 Row(s), 1 Deck(s)", Current Rating=8A, Voltage Rating=160V, Fastening Method=SOLDER, Mount=Board, Number of Decks=1, Number of Rows=1, Number of Ways=8, Reach SVHC Compliant=Yes, RoHS Compliant=Yes, Safety Approval=UL, Terminal and Terminal Block Type="STRIP TERMINAL BLOCK"
J5: library part CMP-1502-03213-3, Contact Resistance=30mΩ, Current Rating=5A, Insulation Resistance=1GΩ, Max Operating Temperature=105°C, Min Operating Temperature=-40°C, Voltage Rating=20V, Connector Type=USB, Contact Material="Gold, Nickel", Gender=Receptacle, Height=3.16mm, Mount="Surface Mount, Through Hole", NexarPartId=68112674, Number of Contacts=24, Number of Pins=24, Orientation=Horizontal, Packaging="Tape and Reel", Pin Length=1.5mm, RoHS=Compliant, USB Standard="USB 3.1"
L1 L3: library part CMP-030-000022-1, "Inductor 4.7uH 4.5A 60mOhm", Design Item ID=IHLP2020CZER4R7M11, Made By="Diego Gomez Ruiz", Source=Inductors.SchLib
Q1 Q2 Q3: library part CMP-056-000000-1, "MOSFET P-CH 50V 130MA SOT-23", Design Item ID=BSS84, Made By="Brennan Swanton", Source=Transistors.SchLib
Q4 Q5: library part CMP-056-000008-2, "MOSFET N-Channel 45V 4A .065 ohm @ 5V", Design Item ID=RVQ040N05, Made By="Jamie Smith", Source=Transistors.SchLib
Q6 Q7 Q8: "No Description Available", Mfr_Name="ROHM Semiconductor", Copyright="Copyright (C) 2024 Ultra Librarian. All rights reserved.", Manufacturer_Part_Number=RE1C002UNTCL, RefDes=RefDes, Type=DEV
R1_B1 R1_B2 R2_B1 R2_B2 R6 R7 R13 R14 R18 R19 R26 R27 R28 R29 R30 R31: library part CMP-024-000034-3, "10K OHM 1% 1/4W 1206", Supplier Part Number 1=541-2247-1-ND, Design Item ID=ERJ-8ENF1002V, Made By="Brennan Swanton", Reviewed By="Carter Allen", Source=Resistors.SchLib, Supplier 1=Digi-Key
R3 R24: library part CMP-024-000041-3, "120 OHM 1% 1/4W 1206", Design Item ID=ERJ-8ENF1200V, Made By="Brennan Swanton", Reviewed By="Carter Allen", Source=Resistors.SchLib
R4: library part CMP-024-000052-3, "22 OHM 1% 1/4W 1206", Design Item ID=ERJ-8ENF22R0V, Made By="Brennan Swanton", Reviewed By="Carter Allen", Source=Resistors.SchLib
R5 R20 R25: library part CMP-024-000074-4, "51 OHM 1% 1/4W 1206", Design Item ID=ERJ-8ENF51R0V, Made By="Jamie Smith", Source=Resistors.SchLib
R8 R11: library part CMP-024-000012-3, "RES SMD 30 OHM 0.5% 1/4W 1206", Design Item ID=ERA-8AHD300V, Made By="Jamie Smith", Reviewed By="Raphael Navarro", Source=Resistors.SchLib
R9: library part CMP-024-000100-1, "30.9k OHM 1.0% 100 mW 0603", Design Item ID=CRCW060330K9FKEA, Source=Resistors.SchLib
R10 R16: library part CMP-2003-01839-2, "RES Thick Film, 174kΩ, 1%, 0.25W, 100ppm/°C, 1206"
R12: library part CMP-024-000023-3, "RES SMD 52.3K OHM 0.1% 1/4W 1206", Design Item ID=ERA-8AEB5232V, Made By="Raphael Navarro", Reviewed By="Jamie Smith", Source=Resistors.SchLib
R15 R22: library part CMP-2003-02123-2, "RES Thick Film, 36.5kΩ, 1%, 0.25W, 100ppm/°C, 1206"
R17: library part CMP-024-000007-3, "RES SMD 10K OHM 0.1% 1/4W 1206", Design Item ID=ERA-8AEB103V, Made By="Rita Yang", Source=Resistors.SchLib
R21 R33 R34: library part CMP-024-000028-1, "1K OHM 1% 1/10W 0603", Design Item ID=ERJ-3EKF1001V, Made By="Brennan Swanton", Reviewed By="Carter Allen", Source=Resistors.SchLib
R23: library part CMP-024-000058-4, "330 OHM 1% 1/4W 1206", Supplier Part Number 1=P330FCT-ND, Design Item ID=ERJ-8ENF3300V, Made By="Brennan Swanton", Reviewed By="Carter Allen", Source=Resistors.SchLib, Supplier 1=Digi-Key
R32: library part CMP-024-000035-4, "100K OHM 1% 1/4W 1206", Design Item ID=ERJ-8ENF1003V, Made By="Brennan Swanton", Reviewed By="Carter Allen", Source=Resistors.SchLib
S1_B1 S1_B2: library part CMP-2000-05160-2, "SWITCH TACTILE SPST-NO 0.05A 12V", Case/Package=SMD/SMT, Color=Black, Contact Resistance=100mR, Current Rating=50mA, Max Operating Temperature=60°C, Max Voltage Rating (DC)=12V, Min Operating Temperature=-20°C, Operating Force=160gf, Package Quantity=1, Actuator Length=0.85mm, Actuator Material=Nylon, Actuator Type=Standard, Contact Material=Silver, Contact Plating=Silver, Depth=9mm, Illumination Type=Non-Illuminated, Lead Free="Lead Free", Length=6mm, Max Current Rating=50mA, Mechanical Life=100000Cycles, Mount="Surface Mount", Orientation=Straight, Packaging="Tape and Reel", REACH SVHC="No SVHC", Switch Function=Off-Mom, Termination="Gull Wing", Throw Configuration=SPST, Voltage Rating (DC)=12V
U1: library part CMP-2000-07439-1, "AVR Microcontroller, 1.8 to 5.5 V, 32 KB Flash, 1 KB EEPROM, 2 KB SRAM, -40 to 85 degC, 32-Pin TQFP (32A), RoHS, Tray", Manufacturer=Microchip, Package Description="32-Pin Thin Profile Plastic Quad Flat Package, Body 7 x 7 mm, Pitch 0.8 mm", Package Reference=32A, Datasheet URL=http://ww1.microchip.com/downloads/en/DeviceDoc/40001906A.pdf, Datasheet Version="Rev. A, 04/2017", Manufacturer URL=http://www.microchip.com/, Mounting Technology=SurfaceMount, RoHSCompliant=false
U2: library part CMP-00103-1, "Ultimate GPS Module - 66 channel w/10 Hz updates - PA1616S - MTK3339 Chipset", Part Number=790, Supplier=adafruit
U3 U4: library part CMP-034-000005-2, "Buck Regulator IC Adj. 3A 4.5V-24V Input", Design Item ID=TPS56339DDCR, Source=VoltageRegulators.SchLib
U5: library part CMP-0758-00071-2, "Single Output Low Noise LDO, 150 mA, Fixed 1.8 V Output, 1% Tolerance, 2.2 to 16 V Input, Low IQ, 5-Pin SOT-23 (DBV), -40 to 125 degC, Green (RoHS & no Sb/Br), Tape and Reel", Manufacturer="Texas Instruments", Operating Temperature Range (degC)="-40 to 125", Accuracy (%)=1, ComponentLink1Description="Manufacturer URL", ComponentLink1URL=http://www.ti.com/, ComponentLink2Description=Datasheet, ComponentLink2URL=http://www.ti.com/lit/ds/symlink/lp2985-50.pdf, ComponentLink3Description="Package Specification", ComponentLink3URL=http://www.ti.com/litv/pdf/mpds018j, DatasheetVersion=SLVS522N, Fixed Output Options (V)=1.8, Iout (Max) (A)=0.15, Iq (Typ) (mA)=0.85, Mounting Technology="Surface Mount", Output Options="Fixed Output", PackageDescription="5-Pin Plastic Small Outline, Body 2.9 x 1.6 mm, Pitch 0.95 mm", PackageReference=DBV0005A, PackageVersion=4073253-4/L, Packing="Tape and Reel", PartNumber=LP2985A-18DBVJ, RoHS=TRUE, Vdo (Typ) (mV)=280, Vin (V)="2.2 to 16"
U6: library part CMP-2000-07532-1, "World’s Lowest Power 9-Axis MEMS MotionTracking(TM) Device, 1.71 to 3.6 V, -40 to 85 degC, 24-Pin QFN, RoHS, Tape and Reel", Manufacturer=TDK, Package Description="24-Pin Quad Flat No-lead Package, Body 3 x 3 mm, Pitch 0.4 mm", Package Reference=QFN-24, Datasheet URL=https://www.invensense.com/wp-content/uploads/2016/06/DS-000189-ICM-20948-v1.3.pdf, Datasheet Version="Rev. 1.3, 06/2017", Manufacturer URL=http://www.tdk.com/, Mounting Technology=SurfaceMount
Y1: "1.8432MHz XO (Standard) HCMOS, TTL Oscillator 3.3V Enable/Disable 4-SMD, No Lead", Package=None, Availability=Unavailable, MF="{'manufacturer': u'CTS-Frequency Controls'}", MP=CB3LV-3C-7M372800, Price=None

## Via types
v1: diameter 0.762, hole 0.381, Components_TopLayer to Traces_BottomLayer, 135 vias

## Nets (pads, with @x,y where several pads share a name; then routed paths per layer and width w, separated by ;. In a path a pad name is that pad's centre, name@x,y a point inside that pad or via, vN(x,y) a via of type N, cw(c..) or ccw(c..) an arc to the next point about the centre after c; other vN are vias at no path point)
1PPS: U1.24 U2.13 | length 54.3
  Components_TopLayer w0.381: v1(34.925,28.067) 35.998,29.14 36.185,29.14 36.217,29.172 36.712,29.172 U1.24@36.744,29.204 ; v1(60.833,18.542) 68.476,18.542 72.854,22.92 U2.13@81.206,22.92
  Traces_BottomLayer w0.381: v1(34.925,28.067) 37.631,28.067 43.346,22.352 43.787,22.352 47.597,18.542 v1(60.833,18.542)
3V3_BOOT: R8.1 U3.6 | length 2.4
  Components_TopLayer w0.381: U3.6@24.318,26.032 26.145,26.032 26.495,26.382 R8.1@26.495,26.416
3V3_EN: R10.1 R15.2 U3.5 | length 5.1
  Components_TopLayer w0.381: U3.5@23.368,26.032 23.368,25.266 24.113,24.52 24.463,24.171 R10.1@24.463,23.876 R15.2@24.463,21.336
3V3_FB: R9.1 R14.2 U3.4 | length 4.8
  Components_TopLayer w0.381: R9.1@22.136,21.336 22.204,21.404 22.204,23.807 R14.2@22.273,23.876 22.376,23.979 22.376,25.99 U3.4@22.418,26.032
3V3_SW: C9.2 L1.1 U3.2 | length 4.8
  Components_TopLayer w0.381: L1.1@23.368,31.318 25.425,31.318 26.075,30.668 26.075,29.346 C9.2@26.465,28.956
5V_BOOT: R11.1 U4.6 | length 2.4
  Components_TopLayer w0.381: R11.1@4.493,37.592 4.493,37.626 4.843,37.976 U4.6@6.67,37.976
5V_EN: R16.1 R22.2 U4.5 | length 5.1
  Components_TopLayer w0.381: R22.2@6.525,42.672 R16.1@6.525,40.132 6.525,39.837 7.62,38.742 U4.5@7.62,37.976
5V_FB: R12.1 R13.2 U4.4 | length 4.8
  Components_TopLayer w0.381: U4.4@8.57,37.976 8.612,38.018 8.612,40.029 R13.2@8.715,40.132 R12.1@8.715,42.672
5V_SW: C17.2 L3.1 U4.2 | length 4.8
  Components_TopLayer w0.381: C17.2@4.523,35.052 4.913,34.662 4.913,33.34 5.563,32.69 L3.1@7.62,32.69
+1V8: C28.2 C31.2 C32.2 D7.2 Q6.G Q7.G Q8.G R26.2 R29.2 R31.2 U5.5 U6.8 U6.9 U6.13 U6.22 | length 31.3
  Components_TopLayer w0.178: Q7.G@33.579,11.053 33.579,11.019 33.668,10.93 33.896,10.93 34.498,10.328 36.289,10.328 36.972,11.011 36.972,11.318 v1(37.084,11.43) R29.2@38.529,11.43 ; Q6.G@33.782,17.026 33.668,17.026 33.223,16.582 33.223,14.456 33.579,14.101 33.579,14.067 33.668,13.978 Q8.G@33.782,13.978 33.896,13.978 34.498,13.376 36.289,13.376 36.972,14.059 36.972,14.366 v1(37.084,14.478) R31.2@38.529,14.478 ; v1(37.084,17.526) R26.2@38.529,17.526 R26.2@38.627,17.428 ; v1(39.633,17.428) 39.633,17.39 40.149,16.873 40.493,16.873 U6.22@40.497,16.869 ; U6.13@43.072,18.644 43.605,19.177 v1(43.688,19.177) ; U6.8@43.647,16.469 U6.8@43.651,16.473
  Components_TopLayer w0.381: 50.546,13.97 50.572,13.944 D7.2@53.467,13.944
  Components_TopLayer w0.508: R26.2@38.627,17.428 v1(39.633,17.428)
  Traces_BottomLayer w0.178: 43.307,17.907 43.688,18.288 v1(43.688,19.177) ; v1(44.831,14.859) v1(44.831,16.002)
  Traces_BottomLayer w0.762: v1(37.084,11.43) v1(37.084,14.478) v1(37.084,17.526)
+3V3: C1.2 C2.2 C3.2 C5.2 C6.2 C7.2 C8.2 C10.2 C11.2 C12.2 C13.2 C14.2 C29.2 J1.2 J2.1 L1.2 Q1.2 Q2.2 Q3.2 R1_B1.2 R1_B2.2 R6.2 R7.2 R9.2 R17.2 R21.2 R25.1 R27.2 R28.2 R30.2 R33.2 U1.4 U1.18 U2.1 U5.1 U5.3 Y1.1 Y1.4 | length 85.6
  Components_TopLayer w0.178: v1(29.337,12.954) R28.2@29.337,14.399 ; v1(43.434,8.255) 43.546,8.367 43.546,8.797 44.228,9.479 U5.3@44.354,9.479
  Components_TopLayer w0.381: R9.2@20.536,21.336 20.536,20.485 21.463,19.558 v1(29.21,19.558) ; v1(30.124,36.025) 31.097,35.052 R21.2@32.093,35.052 ; C1.2@31.623,33.352 31.675,33.404 C3.2@33.782,33.404 33.96,33.582 35.233,33.582 v1(35.306,33.655) 35.655,34.004 U1.18@36.744,34.004 ; v1(38.227,20.841) R6.2@38.227,22.177 ; v1(40.513,20.955) R7.2@40.513,22.177 ; v1(42.799,20.955) R27.2@42.799,22.177 ; U1.4@45.044,31.604 45.076,31.636 46.879,31.636 C2.2@46.99,31.747 ; v1(48.768,31.75) 48.766,31.748 46.991,31.748 C2.2@46.99,31.747 ; v1(49.523,37.448) 49.54,37.465 R30.2@51.006,37.465 ; v1(55.372,10.668) 55.475,10.668 55.602,10.795 R33.2@56.858,10.795 ; C8.2@55.88,31.037 54.573,31.037 53.508,29.972 Y1.1@53.408,29.972 v1(51.308,29.972) Y1.4@49.208,29.972 49.108,29.972 48.398,30.682 48.398,30.782 47.717,31.463 47.274,31.463 C2.2@46.99,31.747 ; C5.2@58.166,33.023 C6.2@59.944,33.023 C7.2@61.722,33.023 v1(63.212,33.023) 64.701,33.023 65.098,33.42 U2.1@65.606,33.42 ; v1(64.008,12.446) 64.704,11.75 Q2.2@65.568,11.75 ; v1(67.056,45.593) R1_B2.2@68.501,45.593 ; v1(71.519,10.704) 71.918,11.103 Q3.2@71.918,11.75 ; v1(78.232,10.922) 78.522,11.212 Q1.2@78.522,12.004
  Traces_BottomLayer w0.381: v1(23.368,38.989) 29.21,33.147 v1(29.21,19.558) 27.305,17.653 R25.1@24.559,17.653 ; v1(39.116,6.35) R17.2@40.561,6.35 ; R1_B1.2@72.342,45.847 72.366,45.823 72.366,43.839 v1(72.39,43.815)
  other v1: 43.434,12.192 44.577,13.208 11.811,17.653 23.368,41.529 23.368,44.196
+5V: C18.2 C19.2 C20.2 C23.2 C26.2 J3.1 J5.A4 J5.A9 J5.B4 J5.B9 L3.2 R12.2 R24.2 | length 123.4
  Components_TopLayer w0.254: J5.A4@4.719,11.809 4.742,11.786 4.742,10.586 J5.B9@4.769,10.559 ; J5.B4@7.169,10.559 7.196,10.586 7.196,11.786 J5.A9@7.219,11.809
  Components_TopLayer w0.381: 8.763,18.923 8.763,16.891 10.541,15.113 v1(11.661,15.113) ; v1(10.033,42.672) R12.2@11.605,42.672
  Traces_BottomLayer w0.254: J5.B9@4.769,10.559 4.769,10.65 5.308,11.189 6.63,11.189 7.169,10.65 J5.B4@7.169,10.559
  Traces_BottomLayer w0.381: v1(7.493,23.622) 3.175,27.94 3.175,43.434 4.445,44.704 8.001,44.704 v1(10.033,42.672) ; 23.622,1.141 23.622,8.82 25.546,10.744 25.546,13.782 24.51,14.818 R24.2@24.51,15.113
  Traces_BottomLayer w0.762: 5.969,11.409 7.493,12.933 7.493,15.113 ; v1(7.493,20.066) v1(7.493,19.05) 7.493,15.113 ; J3.1@51.648,3.048 49.741,1.141 23.622,1.141 12.003,1.141 11.557,1.587 11.557,11.049 7.493,15.113